# EAGLE board MINI_SAM_D51_003 (EAGLE 9.0.0)
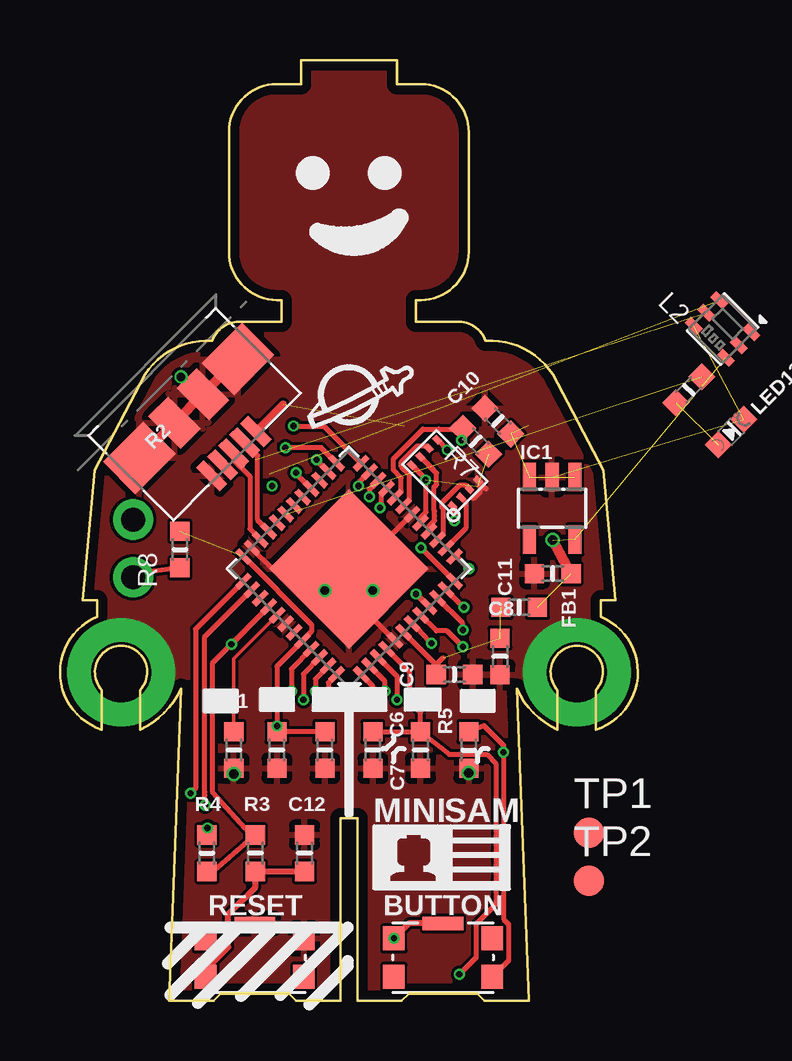
[diagram p0: board, top side]
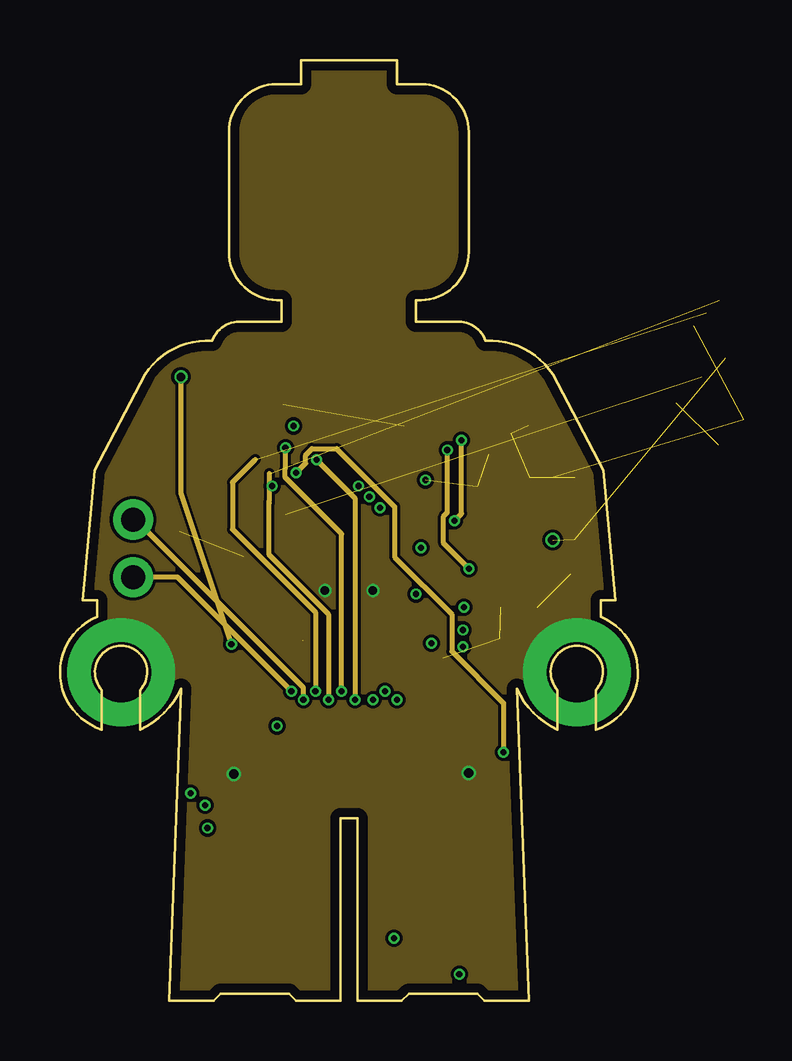
[diagram p1: board, inner layer Route2]
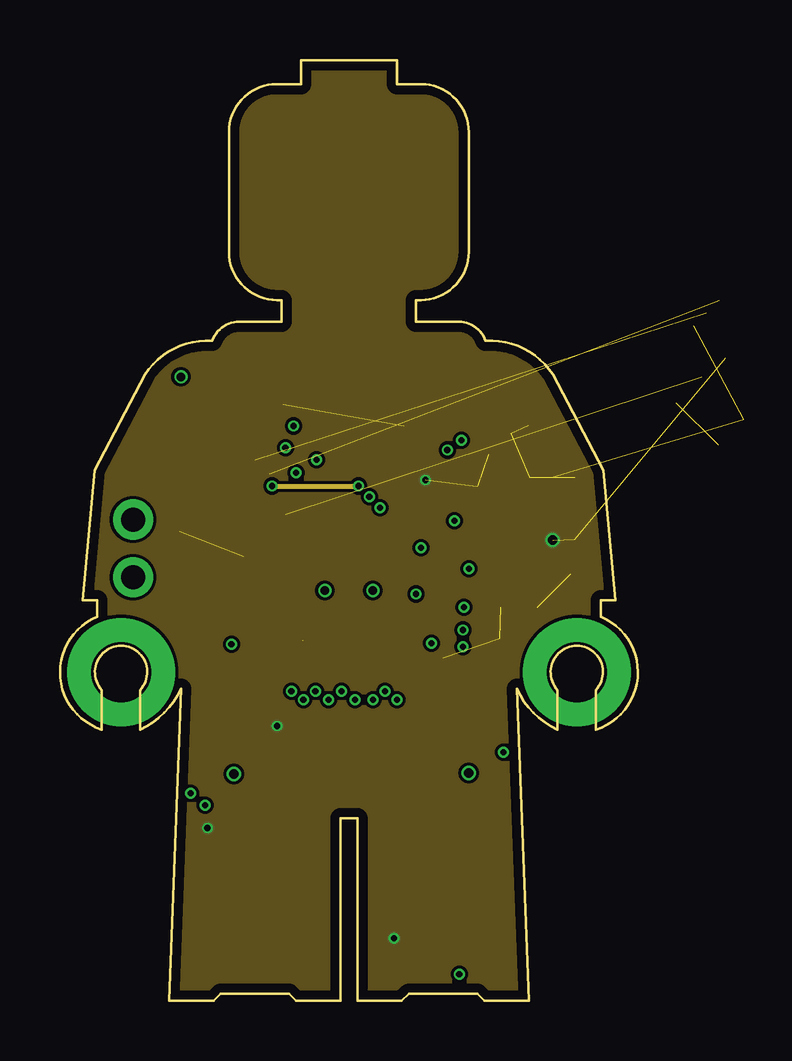
[diagram p2: board, inner layer Route15]
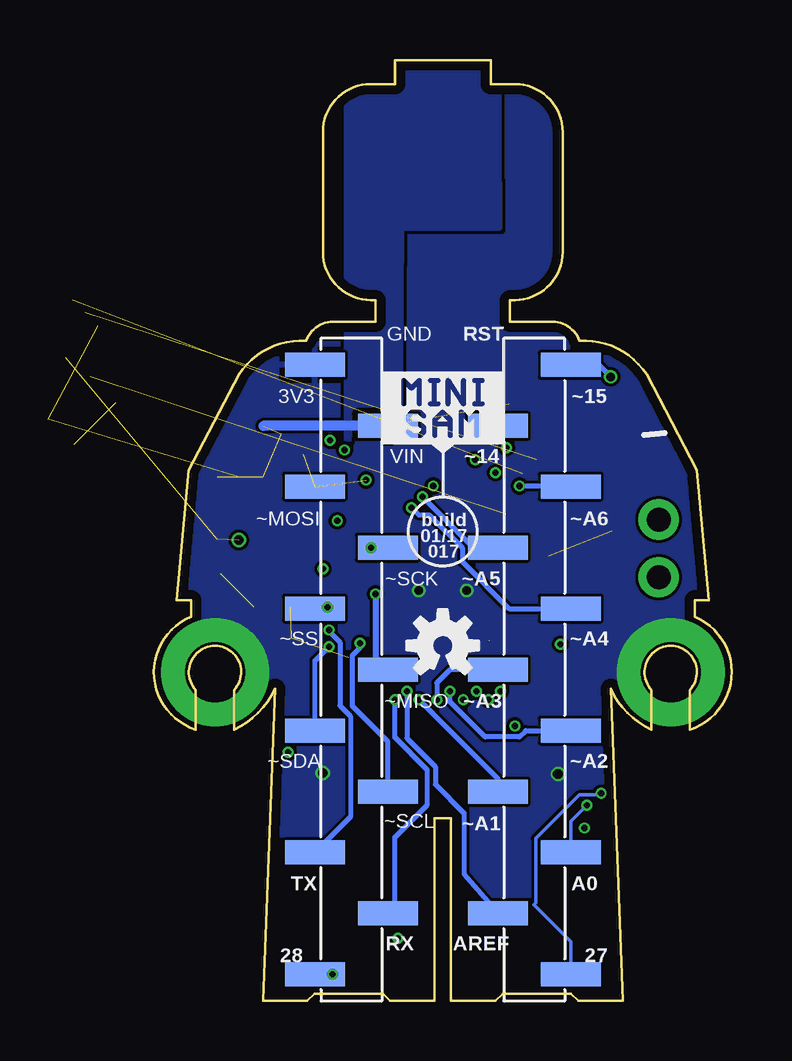
[diagram p3: board, bottom side, seen from below]

Size 24.1 x 39.2 mm. Coordinates in mm from the lower left corner, seen from the top.
Outline: 10.05,39.2 14.05,39.2 14.05,38.2 15.05,38.2 arc-90 17.05,36.2 17.05,31.2 arc-90 15.05,29.2 14.85,29.2 14.85,28.3 16.73,28.3 arc-63 17.75,27.5 arc-60 20.55,26.1 22.65,22.1 23.15,16.7 22.55,16.7 22.55,16 arc-140 22.35,11.3 22.35,12.95 arc132 21.55,14.8 arc132 20.75,12.95 20.75,11.3 arc-40 19.05,13 19.55,0 17.7,0 17.4,0.3 14.55,0.3 14.25,0 12.4,0 12.4,7.6 11.7,7.6 11.7,0 9.85,0 9.55,0.3 6.7,0.3 6.4,0 4.55,0 5.05,13 arc-40 3.35,11.3 3.35,12.95 arc132 2.55,14.8 arc132 1.75,12.95 1.75,11.3 arc-140 1.55,16 1.55,16.7 0.95,16.7 1.45,22.1 3.55,26.1 arc-60 6.35,27.5 arc-63 7.37,28.3 9.25,28.3 9.25,29.2 9.05,29.2 arc-90 7.05,31.2 7.05,36.2 arc-90 9.05,38.2 10.05,38.2 10.05,39.2
Copper layers (1*2*15*16): Top 0.035559375mm / dielectric 0.17018125mm / Route2 0.01778125mm / dielectric 47mil / Route15 0.01778125mm / dielectric 0.17018125mm / Bottom 0.035559375mm
Design rules "oshpark-4layer": minimum track width 5mil, minimum drill 10mil, track to track 5mil, track to pad 5mil, pad to pad 5mil, via to via 5mil, smd to smd 5mil, copper to edge 15mil, drill to drill 6mil, minimum pad ring 4mil, minimum via ring 4mil, stop-mask expansion 2.5mil, vias tented up to drill 0mil, thermal gap 10mil

## Footprints (pad centres in the part's own frame; a part is rotated, then mirrored left to right if it is on the bottom)
_0603MP = smd 0.8 x 0.8: 1 -0.762,0; 2 0.762,0
SOT23-5 = smd 0.55 x 1.2: 1 -0.95,-1.3; 2 0,-1.3; 3 0.95,-1.3; 4 0.95,1.3; 5 -0.95,1.3
TQFN48_7MM = smd 0.25 x 0.75: 1 -2.75,-3.475; 2 -2.25,-3.475; 3 -1.75,-3.475; 4 -1.25,-3.475; 5 -0.75,-3.475; 6 -0.25,-3.475; 7 0.25,-3.475; 8 0.75,-3.475; 9 1.25,-3.475; 10 1.75,-3.475; 11 2.25,-3.475; 12 2.75,-3.475; 25 2.75,3.475; 26 2.25,3.475; 27 1.75,3.475; 28 1.25,3.475; 29 0.75,3.475; 30 0.25,3.475; 31 -0.25,3.475; 32 -0.75,3.475; 33 -1.25,3.475; 34 -1.75,3.475; 35 -2.25,3.475; 36 -2.75,3.475 | smd 0.75 x 0.25: 13 3.475,-2.75; 14 3.475,-2.25; 15 3.475,-1.75; 16 3.475,-1.25; 17 3.475,-0.75; 18 3.475,-0.25; 19 3.475,0.25; 20 3.475,0.75; 21 3.475,1.25; 22 3.475,1.75; 23 3.475,2.25; 24 3.475,2.75; 37 -3.475,2.75; 38 -3.475,2.25; 39 -3.475,1.75; 40 -3.475,1.25; 41 -3.475,0.75; 42 -3.475,0.25; 43 -3.475,-0.25; 44 -3.475,-0.75; 45 -3.475,-1.25; 46 -3.475,-1.75; 47 -3.475,-2.25; 48 -3.475,-2.75 | smd 4.7 x 4.7: THERMAL 0,0
MOLEX_47346-1001 = smd 0.45 x 1.38: P1 1.3,-2.66; P2 0.65,-2.66; P3 0,-2.66; P4 -0.65,-2.66; P5 -1.3,-2.66 | smd 2.375 x 1.9: PAD1 -2.913,0; PAD4 2.913,0 | smd 1.175 x 1.9: PAD2 -0.838,0; PAD3 0.838,0
1X11_SMT = smd 1 x 2.5: 1 -12.7,1.52; 2 -10.16,-1.52; 3 -7.62,1.52; 4 -5.08,-1.52; 5 -2.54,1.52; 6 0,-1.52; 7 2.54,1.52; 8 5.08,-1.52; 9 7.62,1.52; 10 10.16,-1.52; 11 12.7,1.52
1X01_ROUND = drill 1 pad 1.676: 1 0,0
APA102_2020 = smd 0.7 x 0.35: 1 -0.95,-0.75; 2 -0.95,0; 3 -0.95,0.75; 4 0.95,0.75; 5 0.95,0; 6 0.95,-0.75
CHIPLED_0603_NOOUTLINE = smd 0.8 x 0.8: A 0,-0.75; C 0,0.75
KMS_SWITCH = smd 0.9 x 1: 1 -2.05,-0.8; 2 -2.05,0.8; 4 2.05,0.8; 5 2.05,-0.8 | smd 1.7 x 0.55: 3 0,1.425
B1,27 = smd 1.27 x 1.27: TP 0,0
USON8 = smd 0.35 x 0.25: 1 -1.2,0.75; 2 -1.2,0.25; 3 -1.2,-0.25; 4 -1.2,-0.75; 5 1.2,-0.75; 6 1.2,-0.25; 7 1.2,0.25; 8 1.2,0.75

## Placement (x,y rotation side)
C1  0.1µF  [_0603MP]  7.25,10.45 270 top
C2  10µF  [_0603MP]  9.05,10.45 270 top
C3  0.1µF  [_0603MP]  11.05,10.45 270 top
C6  4.7µF  [_0603MP]  15.03,10.45 270 top
C7  0.1µF  [_0603MP]  13.05,10.45 270 top
C8  0.1µF  [_0603MP]  18.35,14.35 270 top
C9  10µF  [_0603MP]  16.45,13.6 0 top
C10  10µF  [_0603MP]  18.25,24.16 315 top
C11  10µF  [_0603MP]  20.55,17.8 180 top
C12  0.1µF  [_0603MP]  10.2,6.15 270 top
FB1  [_0603MP]  19.15,16.4 180 top
IC1  AP2112K-3.3V  [SOT23-5]  20.52,20.52 180 top
IC4  ATSAMD51G_TQFN48  [TQFN48_7MM]  12.05,18 45 top
J1  MOLEX_47346-100147346  [MOLEX_47346-1001]  5.37,24.68 45 top
J3  [1X11_SMT]  15.86,13.8 90 bottom
J4  [1X11_SMT]  8.24,13.8 270 bottom
JP1  [1X01_ROUND]  3.05,17.65 0 top
JP2  [1X01_ROUND]  3.05,20.05 0 top
L2  AP102-2020  [APA102_2020]  27.63,27.99 135 top
LED13  [CHIPLED_0603_NOOUTLINE]  27.97,23.7 315 top  (outside the outline)
R2  1k  [_0603MP]  26.22,25.46 45 top
R3  330Ohm  [_0603MP]  8.15,6.15 270 top
R4  10K  [_0603MP]  6.12,6.15 90 top
R5  10K  [_0603MP]  17.05,10.45 90 top
R7  100k  [_0603MP]  17.33,23.31 135 top
R8  1k  [_0603MP]  5,18.8 90 top
SW1  KMS233GLFG  [KMS_SWITCH]  8.12,1.8 0 top
SW2  KMS233GLFG  [KMS_SWITCH]  15.97,1.8 0 top
TP1  TPB1,27  [B1,27]  22.05,7 0 top
TP2  TPB1,27  [B1,27]  22.05,5 0 top
U1  GD25x16  [USON8]  16.05,22 135 top
U$3  [OSHW-LOGO-S]  12.05,14.8 0 bottom

## Library data of the parts
C1-C3 C6-C12 FB1 IC4 JP1 JP2 L2 LED13 R2-R5 R7 R8 U1 = microbuilder
IC1 = SparkFun-PowerIC; PROD_ID: VREG-12457
J1 SW1 SW2 = Shockley_Custom
J3 J4 = pinhead+
TP1 TP2 = testpad
U$3 = SparkFun-Aesthetics

## Nets
!RESET: IC4.40 J4.1 R3.1 R4.1
A0: IC4.3 J3.2
A1: IC4.10 J3.3
A2: IC4.7 J3.4
A3: IC4.8 J3.5
A4: IC4.9 J3.6
A5: IC4.11 J3.7
A6_D2: IC4.12 J3.8
AREF: C6.1 C7.1 IC4.4 J3.1
D3: IC4.37 J4.11
D4: IC4.23 J4.3
D5: IC4.24 J4.2
D9: IC4.28 R5.2 SW2.5
D10: IC4.29
D11: IC4.30
D12: IC4.32
D13: IC4.31 R2.2
DOTSTAR_CLK: IC4.47 L2.5
DOTSTAR_DATA: IC4.48 L2.6
GND: C1.2 C2.2 C3.2 C6.2 C7.2 C8.2 C9.2 C10.1 C11.2 C12.1 IC1.2 IC4.5 IC4.18 IC4.35 IC4.42 IC4.THERMAL J1.P5 J1.PAD1 J1.PAD2 J1.PAD3 J1.PAD4 J3.11 L2.4 LED13.C R5.1 SW1.3 SW1.4 U1.4
MISO: IC4.38 J4.9
MOSI: IC4.1 J4.8
N$3: LED13.A R2.1
N$4: C12.2 R3.2 SW1.1
N$9: C1.1 IC4.41
QSPI_CS: IC4.20 R7.2 U1.1
QSPI_DATA[0]: IC4.13 U1.5
QSPI_DATA[1]: IC4.14 U1.2
QSPI_DATA[2]: IC4.15 U1.3
QSPI_DATA[3]: IC4.16 U1.7
QSPI_SCK: IC4.19 U1.6
RX_D0: IC4.25 J4.7
SCK: IC4.2 J4.10
SCL: IC4.22 J4.4
SDA: IC4.21 J4.5
SWCLK: IC4.45 JP1.1 R8.1
SWDIO: IC4.46 JP2.1
TX_D1: IC4.26 J4.6
USBD+ [USB_DATA]: IC4.34 J1.P3
USBD- [USB_DATA]: IC4.33 J1.P2
VDD: C2.1 C3.1 C11.1 FB1.1 IC1.5 IC4.17 IC4.36 IC4.44 J3.9 L2.3 R4.2 R7.1 R8.2 SW2.2 SW2.3 U1.8
VDDANA: C8.1 C9.1 FB1.2 IC4.6
VIN: C10.2 IC1.1 IC1.3 J1.P1 J3.10
VSW: IC4.43

## Tracks (layer width: path | path; a pad name or v marks a point on that pad's centre or on a via)
!RESET  (via drill 0.25, 0.35)
  Top 0.203: R4.1 6.12,5.14 R3.1 7.74,7.17 6.37,8.69 6.37,14.09 8.33,16.05 | v7.15,14.85 8.33,16.05 | 8.33,16.05 IC4.40
  Route2 0.203: v7.15,14.85 5.05,21.15 v5.05,26
  Bottom 0.203: v5.05,26 5.55,26.5 J4.1
A0  (via drill 0.25)
  Top 0.203: IC4.3 14.05,13.53 v14.05,12.55
  Bottom 0.203: J3.2 14.05,4.06 14.05,6.82 12.69,8.18 12.69,9.62 14.05,10.97 v14.05,12.55
A1  (via drill 0.25)
  Top 0.203: v16.8,15.45 16.8,15.72 IC4.10
  Bottom 0.203: v16.8,15.45 16.8,15.4 16.34,14.94 16.34,12.3 15.9,11.86 15.9,7.66 J3.3
A2  (via drill 0.25)
  Top 0.203: v15.5,14.9 15.05,15.35 IC4.7
  Bottom 0.203: v15.5,14.9 15.5,14.71 15.82,14.39 15.82,12.28 14.34,10.8 J3.4
A3  (via drill 0.25)
  Top 0.203: IC4.8 15.69,15.42 16.13,15.42 v16.8,14.75
  Bottom 0.203: J3.5 17.38,14.17 v16.8,14.75
A4  (via drill 0.25)
  Top 0.254: v14.85,16.95 14.87,16.95 IC4.9
  Bottom 0.254: v14.85,16.95 14.85,15 14.85,14.73 14.85,14.31 J3.6
A5  (via drill 0.25)
  Top 0.203: IC4.11 16.83,16.4 v16.85,16.4
  Bottom 0.203: J3.7 17.32,16.4 v16.85,16.4
A6_D2  (via drill 0.25)
  Top 0.203: v15.05,18.88 IC4.12
  Bottom 0.203: J3.8 v15.05,18.88
AREF  (via drill 0.25)
  Top 0.203: C6.1 15.03,12.02 14.59,12.46 14.59,13.69 IC4.4 | C6.1 16.23,10.26 17.79,10.26 18.17,9.89 18.17,4.02 17.34,3.19 17.34,1.8 v16.65,1.1 | C7.1 C6.1
  Bottom 0.203: J3.1 v16.65,1.1
D3  (via drill 0.25)
  Top 0.203: IC4.37 5.65,15.49 5.65,8.85 v5.45,8.65
  Bottom 0.152: v5.45,8.65 5.52,8.58 6.35,8.58 8.17,6.76 8.17,4.08 8.25,4 6.72,2.47 J4.11
D4  (via drill 0.25)
  Top 0.203: IC4.23 12.47,21.6 v12.45,21.45
  Route15 0.203: v8.85,21.45 v12.45,21.45
  Bottom 0.203: J4.3 v8.85,21.45
D5  (via drill 0.25)
  Top 0.203: v9.75,23.95 11.01,23.95 IC4.24
  Bottom 0.203: J4.2 v9.75,23.95
D9  (via drill 0.25)
  Top 0.203: R5.2 17.68,11.47 18.5,10.65 v18.5,10.35 18.5,3.4 18.7,3.19 18.7,1.68 SW2.5 | IC4.28 9.85,21.97 v9.85,22
  Top 0.254: 18.02,1.29 SW2.5
  Route2 0.203: v18.5,10.35 18.5,12.4 16.34,14.56 16.34,16.1 13.95,18.49 13.95,20.59 11.54,23.01 10.51,23.01 10.24,22.74 10.24,22.39 v9.85,22
D13  (1 unrouted)
DOTSTAR_CLK  (via drill 0.25)  (1 unrouted)
  Top 0.203: IC4.47 10.65,13.42 v10.65,12.9
  Route2 0.203: 8.14,22.55 7.2,21.6 7.2,19.65 10.65,16.2 v10.65,12.9
DOTSTAR_DATA  (via drill 0.25)  (1 unrouted)
  Top 0.203: IC4.48 11.2,13.26 v11.2,12.55
  Route2 0.203: 8.73,21.97 8.73,20.9 8.73,20.75 8.73,18.58 11.2,16.11 v11.2,12.55
GND  (via drill 0.35, 0.4, 2.5 pad 4.5)  (2 unrouted)
  Top 0.203: 12.3,18.25 IC4.THERMAL | 11.69,18 IC4.THERMAL | IC4.5 12.4,16.59 12.4,18 | IC4.35 8.87,18 IC4.THERMAL | IC4.18 12.4,18 | 12.4,18 IC4.THERMAL | IC4.THERMAL v11.05,17.1 | U1.4 17.78,21.32 17.51,21.39 17.51,21.2 17.24,20.92
  Top 0.406: J1.PAD4 J1.PAD3 J1.PAD2 J1.PAD1
  other vias: 2.55,13.7 21.55,13.7 7.25,9.45 17.05,9.5 13.05,17.1
  pour Top: 4.55,0 19.55,0 19.55,12 21.05,12 21.05,14 22.05,14 22.05,12 24.05,12 24.05,40 0.05,40 0.05,12 2.05,12 2.05,14 3.05,14 3.05,12 4.55,12
  pour Route2: 4.55,0 19.55,0 19.55,12 21.05,12 21.05,14 22.05,14 22.05,12 24.05,12 24.05,40 0.05,40 0.05,12 2.05,12 2.05,14 3.05,14 3.05,12 4.55,12
  pour Bottom (rank 2): 9.75,40 9.75,32 13.55,32 13.55,27.35 24.05,27.35 24.05,12 19.55,12 19.55,0 4.55,0 4.55,12 3.05,12 3.05,14 2.05,14 2.05,12 0.05,12 0.05,40
MISO  (via drill 0.25)
  Top 0.203: IC4.38 6.04,15.17 6.04,8.7 6.03,8.57 6.04,8.56 v6.04,8.16 v6.05,8.15
  Bottom 0.152: v6.05,8.15 6.72,7.48 J4.9
MOSI  (via drill 0.25)
  Top 0.203: v13.05,12.55 13.05,13.11 IC4.1
  Bottom 0.203: v13.05,12.55 9.76,9.26 J4.8
N$3  (1 unrouted)
N$4
  Top 0.254: 6.07,1.07 SW1.1 6.07,1.29 7.02,2.24 7.02,3.6 8.15,4.73 R3.2 C12.2
N$9
  Top 0.152: C1.1 7.25,14.26 IC4.41
QSPI_CS  (via drill 0.25)
  Top 0.203: U1.1 16.45,20.54 v16.45,20 | IC4.20 14.23,21.24 14.23,21.79 13.9,22.12 13.9,22.59 15.13,23.82 15.79,23.82 15.8,23.81 16.79,23.81 R7.2 16.75,23.81 v16.75,23.35
  Route2 0.203: v16.45,20 16.75,20.3 v16.75,23.35
QSPI_DATA[0]  (via drill 0.25)
  Top 0.203: IC4.13 16.53,18.51 v17.05,18 | U1.5 15.73,23.37 v16.15,22.95
  Route2 0.203: v16.15,22.95 16.15,20.35 15.99,20.19 15.99,19.06 v17.05,18
QSPI_DATA[1]
  Top 0.203: IC4.14 16.95,19.72 16.95,20.75 U1.2
QSPI_DATA[2]
  Top 0.203: IC4.15 15.97,19.45 15.97,20.52 15.92,20.56 15.92,20.75 16.65,21.48 16.92,21.48 U1.3
QSPI_DATA[3]
  Top 0.203: IC4.16 15.39,19.78 15.62,20.01 15.62,20.2 15.62,20.4 15.59,20.43 15.59,21.4 15.7,21.51 15.7,21.99 U1.7 15.59,22.1
QSPI_SCK
  Top 0.203: IC4.19 14.56,20.86 14.56,21.93 14.23,22.26 14.23,22.45 14.89,23.11 15.29,23.11 U1.6
RX_D0  (via drill 0.25)
  Top 0.203: IC4.25 10.89,23.05 v9.4,23.05
  Route2 0.203: v9.4,23.05 9.4,22.2 9.39,22.19 9.39,21.81 11.75,19.45 v11.75,12.9
  Bottom 0.152: 6.76,11.26 J4.7
  Bottom 0.203: 6.76,11.26 8.59,11.26 8.86,10.99 10.29,10.99 11.75,12.45 v11.75,12.9
SCK  (via drill 0.25)
  Top 0.203: v13.55,12.9 13.55,13.32 IC4.2
  Bottom 0.203: v13.55,12.9 13.55,10.94 12.36,9.75 12.36,9.01 11.16,7.82 11.16,5.28 J4.10
SCL  (via drill 0.25)
  Top 0.203: IC4.22 12.9,21.32 v12.9,21
  Bottom 0.203: v12.9,21 10.78,18.88 J4.4
SDA  (via drill 0.25)
  Top 0.203: v13.35,20.55 13.45,20.66 13.39,20.72 13.39,21.11 IC4.21
  Bottom 0.203: J4.5 9.29,16.34 11.24,18.29 11.24,18.87 12.61,20.25 13.05,20.25 v13.35,20.55
SWCLK  (via drill 0.25)
  Top 0.203: IC4.45 9.65,13.83 v9.65,12.9 | R8.1 3.18,17.78 JP1.1
  Route2 0.203: v9.65,12.9 4.9,17.65 JP1.1
SWDIO  (via drill 0.25)
  Top 0.203: IC4.46 10.15,13.62 v10.15,12.55
  Route2 0.203: v10.15,12.55 10.15,13.05 3.15,20.05 JP2.1
TX_D1  (via drill 0.25)
  Top 0.203: IC4.26 10.7,22.53 v10.7,22.55
  Route2 0.203: v10.7,22.55 12.3,20.95 v12.3,12.55
  Bottom 0.203: J4.6 11.75,13.8 12.3,13.25 v12.3,12.55
USBD+
  Top 0.203: J1.P3 7.25,22.52 7.92,21.85 7.92,19.66 IC4.34
USBD-
  Top 0.203: IC4.33 8.25,20.03 8.25,22.72 J1.P2
VDD  (via drill 0.25, 0.4)  (7 unrouted)
  Top 0.203: IC4.17 15.04,20.13 15.26,20.36 15.26,21.72 | 15.26,21.72 U1.8 | v15.25,21.7 v15.25,21.71 15.26,21.72 | C3.1 C2.1 | IC4.44 9.05,13.94 C2.1 | 5,19.85 R8.2 | R4.2 v6.15,7.19 v6.15,7.2 | C2.1 v9.05,11.45 | IC4.36 10.5,15.66 10.5,15.4 10.12,15.02
  Top 0.254: SW2.2 14.55,3.23 SW2.3
  Top 0.406: C11.1 v20.55,19.2
  Bottom 0.305: J3.9 17.4,21.45 18.3,21.4
  other vias: 13.92,2.6
  pour Route15: 4.55,0 19.55,0 19.55,12 21.05,12 21.05,14 22.05,14 22.05,12 24.05,12 24.05,40 0.05,40 0.05,12 2.05,12 2.05,14 3.05,14 3.05,12 4.55,12
VDDANA  (2 unrouted)
  Top 0.203: IC4.6 15.68,14.01 15.68,14 | 15.68,14 C9.1 | 15.97,14.29 15.68,14
VIN  (4 unrouted)
  Top 0.305: J1.P1 9.3,24.85
  Bottom 0.406: J3.10 19.54,23.96
  pour Bottom: 9.75,40 9.7,32.2 13.8,32.2 13.85,23.35 16,23.35 16.05,23.35 16.05,40

## Text on the board
tNames: R2 | MINI | SAM | RESET | BUTTON
bNames: RST | GND | ~15 | 3V3 | ~14 | VIN | ~A6 | ~MOSI | build / 01/17 / 017 | ~A5 | ~SCK | ~A4 | ~SS | ~A3 | ~MISO | ~A2 | ~SDA | ~A1 | ~SCL | A0 | TX | 27 | AREF | RX | 28
_tNames: L | L | RGB | RGB | IC1 | IC1 | C1 | C1 | FB1 | FB1 | C10 | C10 | C11 | C11 | C2 | C2 | C3 | C3 | C8 | C8 | C9 | C9 | C6 | C6 | R5 | R5 | C7 | C7 | R3 | R3 | R4 | R4 | C12 | C12
_bNames: IC2 | IC2 | R6 | R6 | C13 | C13 | JP1 | JP1